# Altium PCB io_expansion_v9.PcbDoc
Units mil, origin at the board's own origin, x right, y up, seen from the top; angles counter-clockwise.
Board outline 1100 x 1020 mil, 4 copper layers (Top Layer, GND, VCC, Bottom Layer), stack 30.634 mil thick; 18 components, 30 nets, 131 pads, 64 vias.
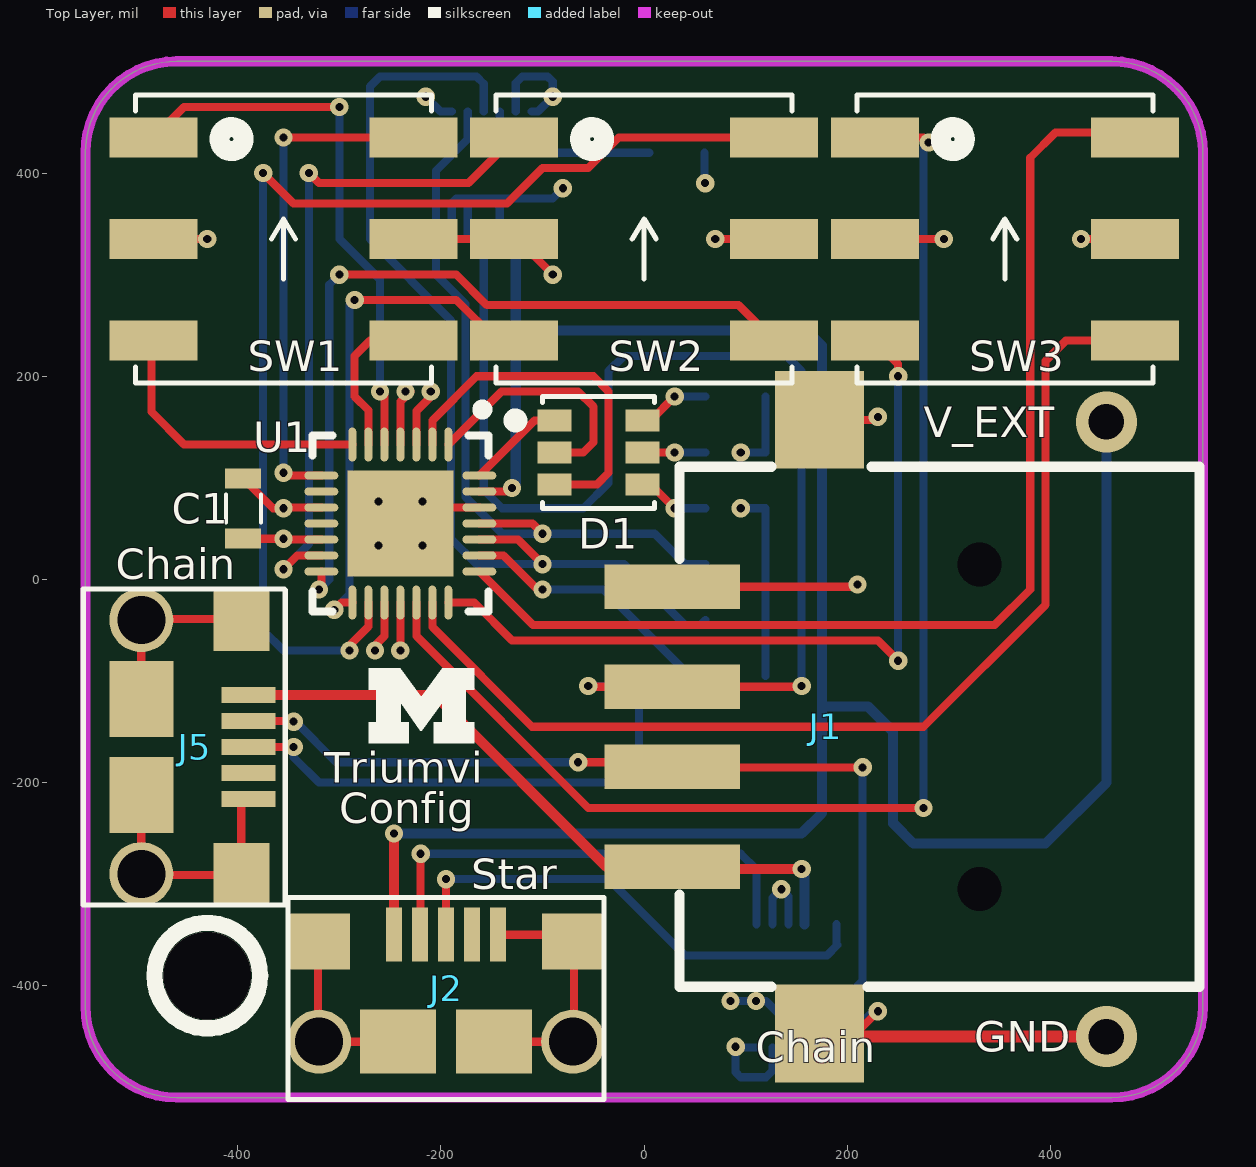
[diagram p0: Top Layer view]
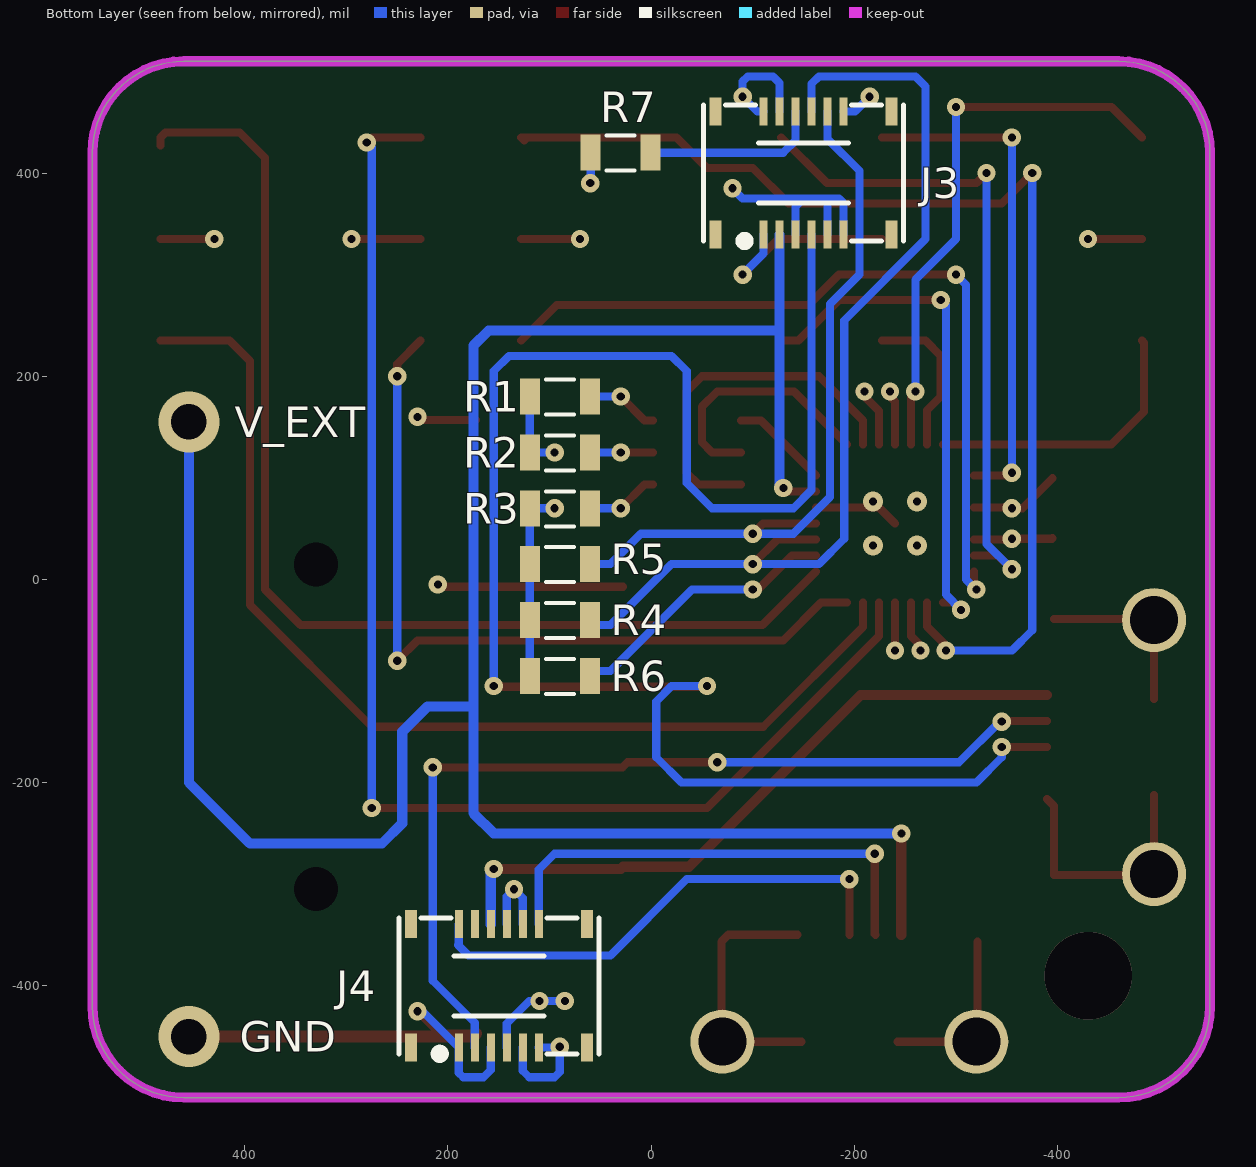
[diagram p1: Bottom Layer view, seen from below]
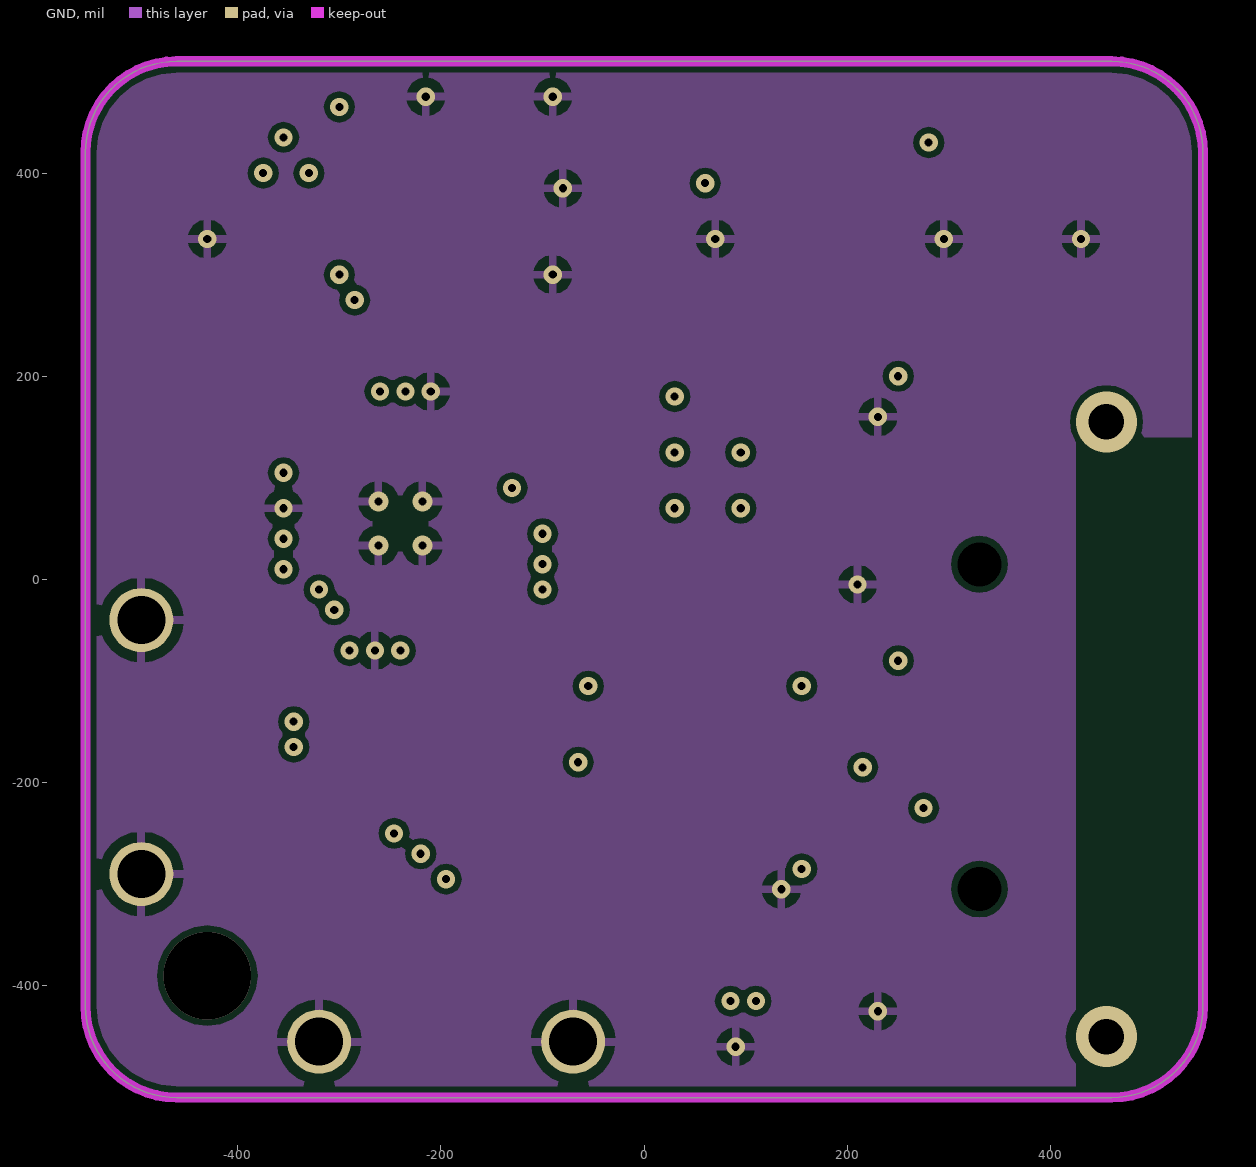
[diagram p2: GND]
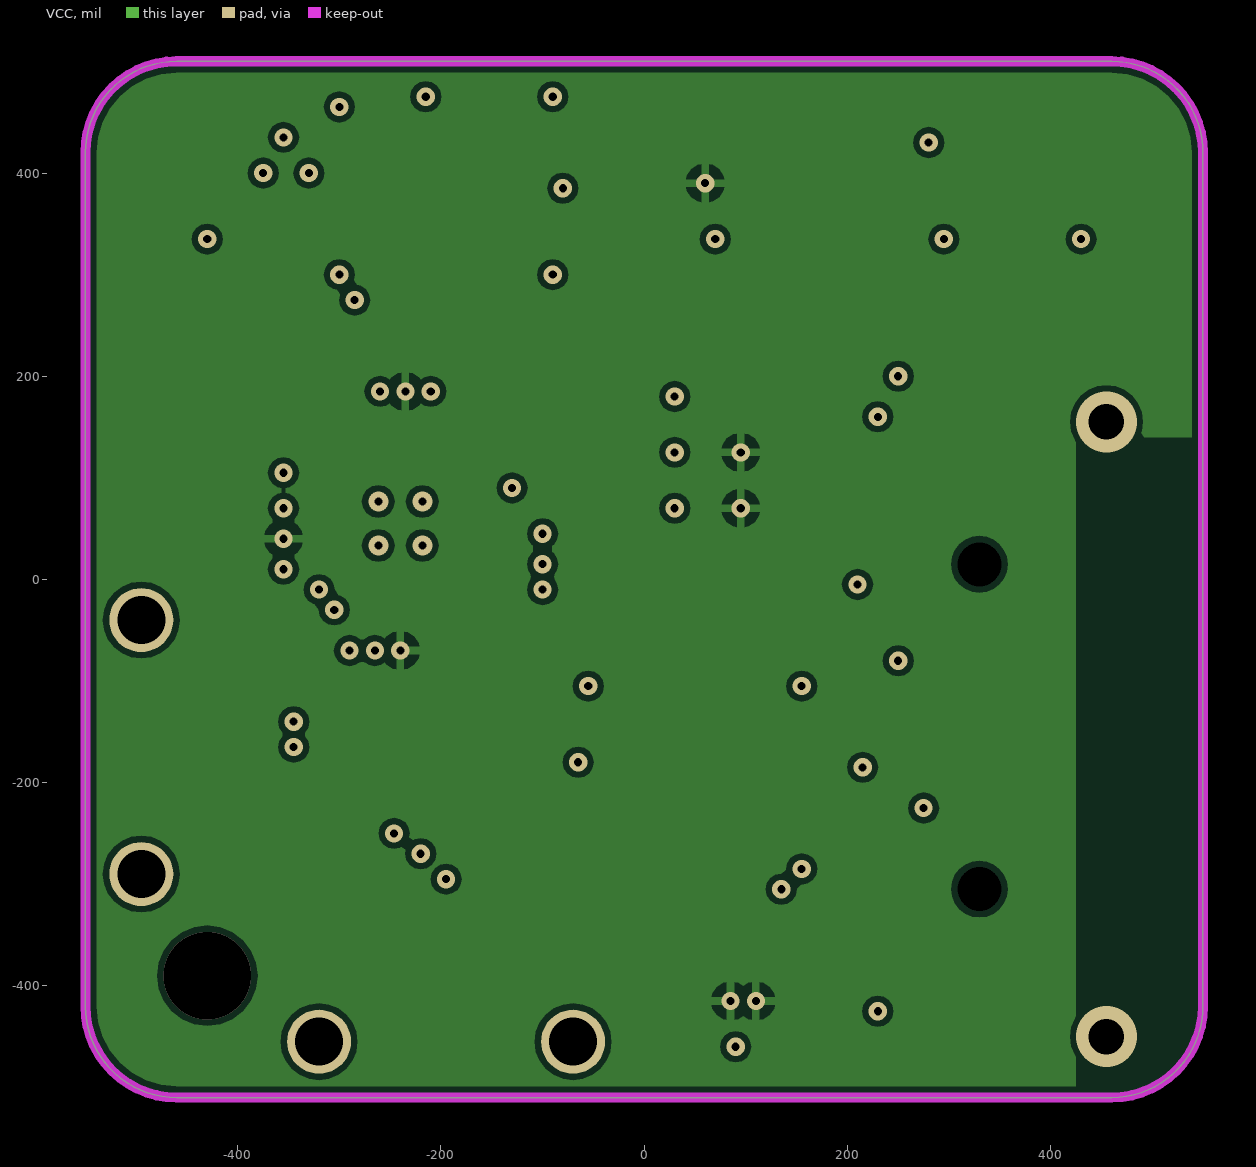
[diagram p3: VCC]
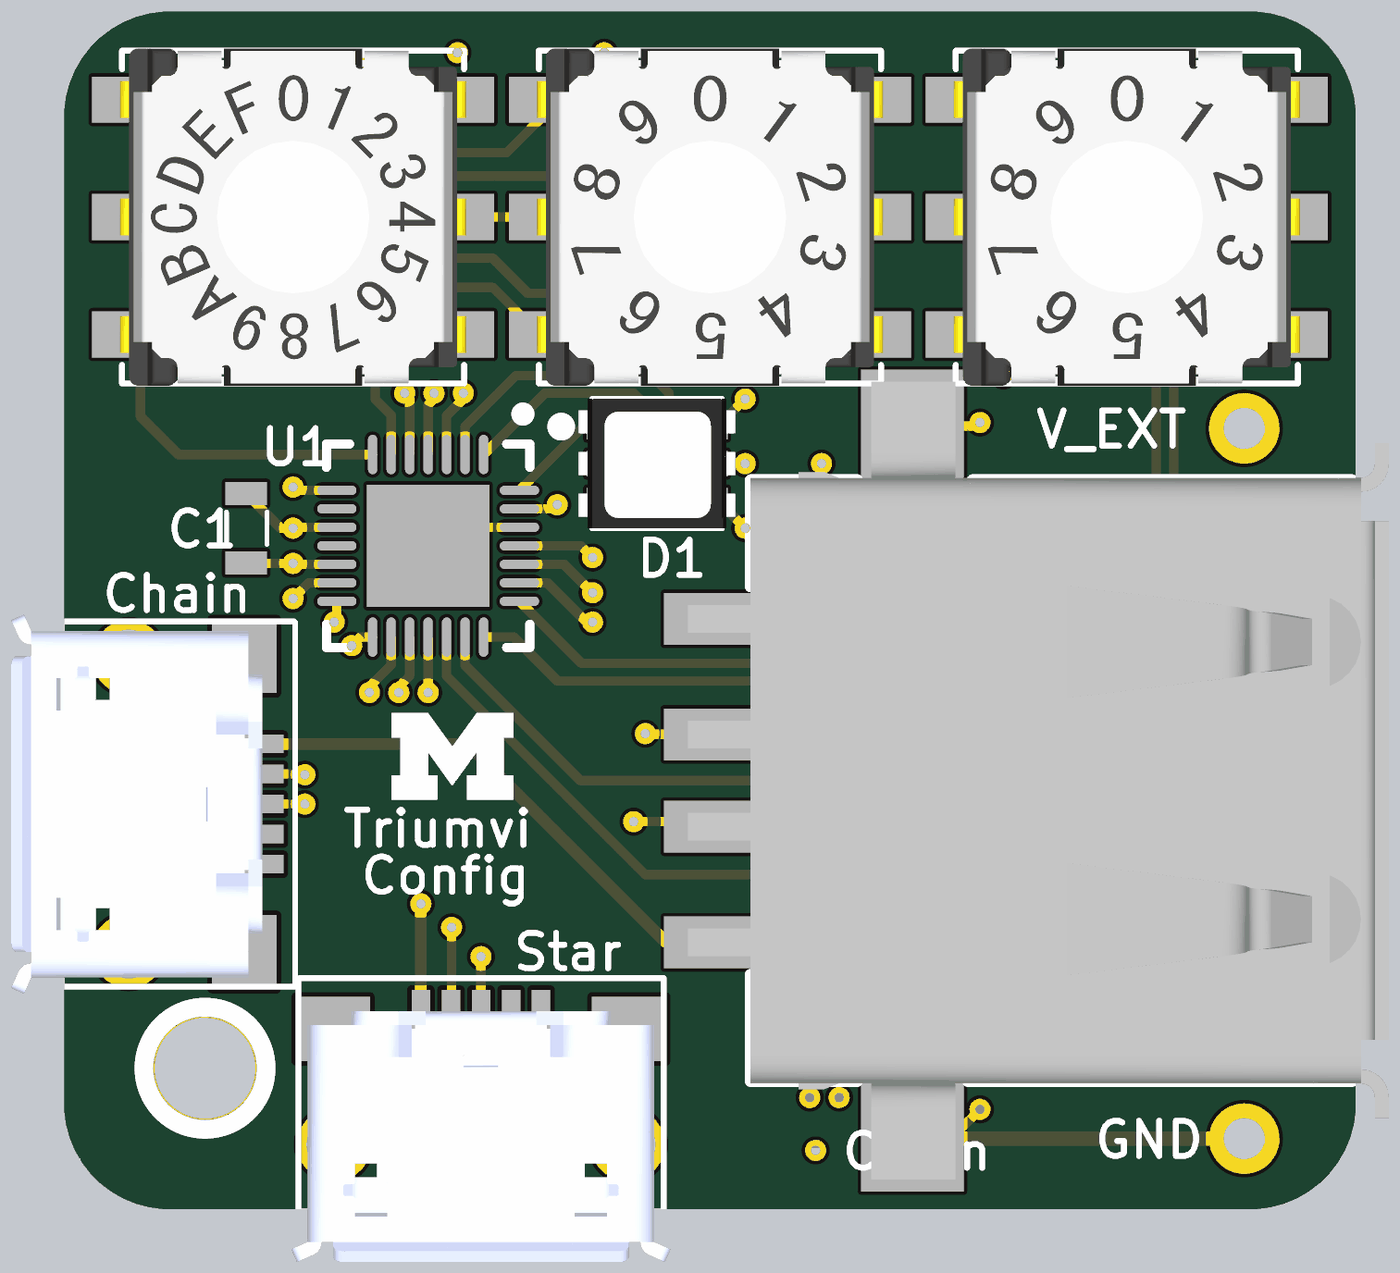
[diagram p4: 3D render of the assembled board from above, using the file's embedded part models]

## Layer stack, top to bottom
Top Solder: solder mask 0.4, Solder Resist, Dk 3.5
Top Layer: signal copper 1.4
Dielectric 1: core 10, FR-4, Dk 4.2
GND: signal copper 1.417
Dielectric 3: prepreg 5, Dk 4.2
VCC: signal copper 1.417
VCC: core 10, Dk 4.2
Bottom Layer: signal copper 1.4
Bottom Solder: solder mask 0.4, Solder Resist, Dk 3.5

## Board outline
-550,-420 -550,420 cw(c-460,420) -460,510 460,510 cw(c460,420) 550,420 550,-420 cw(c460,-420) 460,-510 -460,-510 cw(c-460,-420)

## Design rules (kind name [scope] priority, off if disabled: settings)
Clearance "non plated holes" [InPadClass('NPHOLES')] p1: gap=10 // Sunstone Circuits Minimum Clearance Rule (MLB~4&6 Layer Designs)
Clearance "Clearance~Sunstone Circuits" [All] p2: gap=6 // Sunstone Circuits Minimum Clearance Rule (MLB~4&6 Layer Designs)
DiffPairsRouting [All] p1: maxlimit=10 minlimit=10 mostfreqgap=10 toplayer_minwidth=6 toplayer_maxwidth=15 toplayer_prefwidth=15 midlayer1_minwidth=6 midlayer1_maxwidth=15 midlayer1_prefwidth=15 midlayer2_minwidth=6 midlayer2_maxwidth=15 midlayer2_prefwidth=15 bottomlayer_minwidth=6 bottomlayer_maxwidth=15 bottomlayer_prefwidth=15 maxuncoupledlength=500
HoleSize "HoleSize~Sunstone Circuits" [All] p1: absolutevalues=TRUE maxlimit=251 minlimit=8 maxpercent=80.000 minpercent=20.000 // Sunstone Circuits Hole Size Rule (MLB~4&6 Layer Designs)
HoleSize Testpoint [All] p2: absolutevalues=TRUE maxlimit=100 minlimit=1 maxpercent=80.000 minpercent=20.000
HoleSize TestPointUsage [All] p3: absolutevalues=TRUE maxlimit=100 minlimit=1 maxpercent=80.000 minpercent=20.000
MinimumAnnularRing "MinimumAnnularRing~Sunstone Circuits" [All] p1 off: minimumring=7 // Sunstone Circuits Minimum Annular Ring (MLB~4&6 Layer Designs)
MinimumSolderMaskSliver [All] p1 off: minsoldermaskwidth=10
PlaneClearance "PlaneClearance~Sunstone Circuits" [All] p1: clearance=12 // Sunstone Circuits Power Plane Clearance Rule (MLB~4&6 Layer Designs)
PlaneConnect "PlaneConnect~Sunstone Circuits" [All] p1: planeconnectstyle=Relief reliefexpansion=10 reliefentries=4 reliefconductorwidth=8 reliefairgap=10 // Sunstone Circuits Power Plane Connect Rule (MLB~4&6 Layer Designs)
PolygonConnect "PolygonConnect~Sunstone Circuits" [All] p1: connectstyle=Relief reliefconductorwidth=8 reliefentries=4 polygonreliefangle="90 Angle" airgapwidth=10 // Sunstone Circuits Polygon Connect Style (MLB~4&6 Layer Designs)
RoomDefinition io_expansion [InComponentClass('io_expansion')] p1 off: confinementstyle=ConfineIn formatcopy=TRUE lockcomponents=FALSE outline -539.26,175.77 -539.26,484.23 -260.93,484.23 -260.93,487.41 -39.07,487.41 -39.07,484.23 539.26,484.23 539.26,20.52 544.22,20.52 544.22,-524.67 45.78,-524.67 45.78,-516.59 -450.91,-516.59 -450.91,23.74 -494.61,23.74 -494.61,175.77
RoutingVias "RoutingVias~Sunstone Circuits" [All] p1: holewidth=16 width=30 viastyle="Through Hole" minholewidth=6 minwidth=18 maxholewidth=20 maxwidth=40 // Sunstone Circuits Routing Vias Rule (MLB~4&6 Layer Designs)
ShortCircuit "ShortCircuit~Sunstone Circuits" [All] p1: allowed=FALSE // Sunstone Circuits Short Circuit Rule~Do Not Allow (MLB~4&6 Layer Designs)
SilkToSilkClearance [All] p1 off: silktosilkclearance=10
SilkToSolderMaskClearance [IsPad] p1 off: minsilkscreentomaskgap=10 clearancetoexposedcopper=TRUE
SolderMaskExpansion TentVias [isVia] p1: expansion=-20 // Sunstone Circuits Solder Mask Expansion Rule (MLB~4&6 Layer Designs)
SolderMaskExpansion "SolderMaskExpansion~Sunstone Circuits" [All] p2: expansion=3 // Sunstone Circuits Solder Mask Expansion Rule (MLB~4&6 Layer Designs)
ViasUnderSMD "ViasUnderSMD~Sunstone Circuits" [All] p1: allowed=FALSE // Sunstone Circuits Vias Under SMD~Do Not Allow (MLB~4&6 Layer Designs)
Width "Width~Sunstone Circuits" [All] p1: maxlimit=100 minlimit=6 preferedwidth=10 // Sunstone Circuits Minimum Width Rule (MLB~4&6 Layer Designs)
22 further rules are at their usual default settings.

## Components (designator, comment, footprint, x,y, rotation, side; value= is the part's Value field where it differs from the comment)
C1 "Ceramic capacitor" 0603 -395,70 r90 top
D1 "CLY6D-FKC" PLCC6 -45,125 r0 top
J1 "292303-9" 292303-9 330,-145 r90 top
J2 "micro USB-B" "Micro USB-B" -195,-455 r0 top
J3 "DF40B(2.0)-12DS-0.4V" DF40B(2.0)-12DS-0.4V -150,400 r180 bottom locked
J4 "DF40B(2.0)-12DS-0.4V" DF40B(2.0)-12DS-0.4V 150,-400 r180 bottom locked
J5 "micro USB-B" "Micro USB-B" -495,-165 r270 top
R1 "Chip resistor" 0603 90,180 r180 bottom
R2 "Chip resistor" 0603 90,125 r180 bottom
R3 "Chip resistor" 0603 90,70 r180 bottom
R4 "Chip resistor" 0603 90,-40 r180 bottom
R5 "Chip resistor" 0603 90,15 r180 bottom
R6 "Chip resistor" 0603 90,-95 r180 bottom
R7 "Chip resistor" 0603 30,420 r180 bottom
SW1 "SH-7050TA" SH-7050A -355,335 r0 top
SW2 "SH-7010TA" SH-7010A 0,335 r0 top
SW3 "SH-7010TA" SH-7010A 355,335 r0 top
U1 "SX1509B" QFN40P400X400X60_HS-29N -240,55 r270 top

## Footprints (in the part's own frame and the unit in brackets; to place one, negate y for a bottom-side part, rotate by r counter-clockwise, add the part's x,y. Pads: shape width x height; smd on the part's side, far side on the other; paste and mask are expansions set on the pad)
0603 [mm] "2-Leads, Body 1.55x0.85mm, IPC Medium Density"
  rect 0.5x0.9 smd: 1(-0.75,0) 2(0.75,0)
  silkscreen extent -0.35,-0.45 0.35,0.43, body extent -0.75,-0.42 0.75,0.43, height 0.5
292303-9 [mm] "USB A, SMT"
  rect 1.12x3.39 smd: 1(-3.5,7.68) 2(-1,7.68) 3(1,7.68) 4(3.5,7.68)
  rect 2.44x2.22 smd: 5(-7.67,4) 5(7.67,4)
  rect 0x0 hole 1.1 unplated: ""(-4.06,0) ""(4.06,0)
  silkscreen extent -6.5,-5.5 6.5,7.5, body extent -8.63,-6.3 8.63,8.86, height 7.81
DF40B(2.0)-12DS-0.4V [mm] "Hirose DF40 Series, 0.4 mm pitch, 2.0 mm stack height, 12 positions"
  rect 0.2x0.7 smd: 1(-1,-1.54) 2(-0.6,-1.54) 3(-0.2,-1.54) 4(0.2,-1.54) 5(0.6,-1.54) 6(1,-1.54) 7(1,1.54) 8(0.6,1.54) 9(0.2,1.54) 10(-0.2,1.54) 11(-0.6,1.54) 12(-1,1.54)
  rect 0.3x0.7 smd: ""(-2.2,-1.54) ""(-2.2,1.54) ""(2.2,-1.54) ""(2.2,1.54)
  silkscreen extent -2.5,-1.8 2.5,1.7, body extent -2.5,-1.69 2.5,1.69, height 1.9
"Micro USB-B" [mm]
  rect 0.4x1.35 smd mask+0.1: 1(-1.3,2.675) 2(-0.65,2.675) 3(0,2.675) 4(0.65,2.675) 5(1.3,2.675)
  rect 1.6x1.4 smd mask+0.1: 6(-3.2,2.5) 6(3.2,2.5)
  round 1.6 hole 1.2: 6(-3.175,0) 6(3.175,0)
  rect 1.9x1.6 smd mask+0.1: 6(-1.2,0) 6(1.2,0)
  silkscreen extent -3.95,-1.45 3.95,3.6, body extent -4.1,-2.54 4.1,2.89, height 2.68
PLCC6 [mm] "CREE PLCC6 LED"
  rect 0.85x0.55 smd: 1(-1.1,0.8) 2(-1.1,0) 3(-1.1,-0.8) 4(1.1,-0.8) 5(1.1,0) 6(1.1,0.8)
  silkscreen extent -2.22,-1.4 1.4,1.4, body extent -1.7,-1.4 1.7,1.4, height 1.85
QFN40P400X400X60_HS-29N [mm] "QFN, 28-Leads, Body 4.00x4.00mm, Pitch 0.40mm, Thermal Pad 2.65x2.65mm, IPC Medium Density"
  oval 0.85x0.2 smd: 1(-1.975,1.2) 2(-1.975,0.8) 3(-1.975,0.4) 4(-1.975,0) 5(-1.975,-0.4) 6(-1.975,-0.8) 7(-1.975,-1.2) 15(1.975,-1.2) 16(1.975,-0.8) 17(1.975,-0.4) 18(1.975,0) 19(1.975,0.4) 20(1.975,0.8) 21(1.975,1.2)
  oval 0.2x0.85 smd: 8(-1.2,-1.975) 9(-0.8,-1.975) 10(-0.4,-1.975) 11(0,-1.975) 12(0.4,-1.975) 13(0.8,-1.975) 14(1.2,-1.975) 22(1.2,1.975) 23(0.8,1.975) 24(0.4,1.975) 25(0,1.975) 26(-0.4,1.975) 27(-0.8,1.975) 28(-1.2,1.975)
  rect 2.65x2.65 smd: 29(0,0)
  silkscreen extent -2.97,-2.2 2.2,2.2, body extent -2.05,-2.05 2.05,2.05, height 0.6
SH-7010A [mm] "Rotary Coded Switch, SH-7000 series, 10 positions, real code, J hook"
  rect 2.2x1 smd: 1(-3.25,2.54) 2(3.25,-2.54) 4(-3.25,-2.54) 8(3.25,2.54) C(-3.25,0) C(3.25,0)
  silkscreen extent -3.7,-3.6 3.7,3.6, body extent -3.75,-3.65 3.75,3.65, height 3.77
SH-7050A [mm] "Rotary Coded Switch, SH-7000 series, 16 positions, real code, J hook"
  rect 2.2x1 smd: 1(-3.25,2.54) 2(3.25,-2.54) 4(-3.25,-2.54) 8(3.25,2.54) C(-3.25,0) C(3.25,0)
  silkscreen extent -3.7,-3.6 3.7,3.6, body extent -3.75,-3.65 3.75,3.65, height 3.77

## Part data
C1: library part C_0.1u_25V_0603_ceramic, "Ceramic capacitor, 0.1 uF, 0603 package"
D1: library part D_CLY6D-FKC, "CREE PLCC6 3 in 1 SMD LED"
J1: "USB 2.0 Type A"
J2 J5: library part "Micro USB", "CONN USB MICRO B RECPT SMT R/A"
J3 J4: "Hirose BM20 Series, 0.4mm pitch, 2mm stack height, 12 pos, header"
R1: library part R_150_0603, "Chip resistor, 150,  0603 package"
R2: library part R_220_0603, "Chip resistor, 220, 0603 package"
R3: library part R_330_0603, "Chip resistor, 330, 0603 package"
R4 R5: library part R_20K_0603, "Chip resistor, 20K, 0603 package"
R6 R7: library part R_100K_0603, "Chip resistor, 100K, 0603 package"
SW1 SW2 SW3: "ROTARY CODED SWITCHES"
U1: "Voltage Level Shifting GPIO  with LED Driver and Keypad Engine"

## Via types
v1: diameter 18, hole 8, Top Layer to Bottom Layer, 57 vias
v2: diameter 19.68, hole 8, Top Layer to Bottom Layer, 4 vias
v3: diameter 60, hole 35, Top Layer to Bottom Layer, 2 vias
v4: diameter 86, hole 86, Top Layer to Bottom Layer, 1 vias

## Nets (pads, with @x,y where several pads share a name; then routed paths per layer and width w, separated by ;. In a path a pad name is that pad's centre, name@x,y a point inside that pad or via, vN(x,y) a via of type N, cw(c..) or ccw(c..) an arc to the next point about the centre after c; other vN are vias at no path point)
BATT_PACK_PWR: C1.1 J4.4 R1.1 R2.1 R3.1 R4.1 R5.1 R6.1 R7.1 U1.4 U1.12 U1.18 | length 575.4
  Top Layer w8: C1.1 -394.53,40 v1(-355,40) -354.25,39.25 U1.12 ; v1(-240,-70) U1.18 ; U1.4 -240,175 -230,185 v1(-235,185)
  Bottom Layer w8: R7.1 59.53,390.47 v1(60,390) ; v1(85,-415) v1(110,-415) 120,-415 142.13,-437.13 J4.4 ; v1(95,70) R3.1 R5.1 R4.1 R6.1 ; v1(95,125) R2.1 R1.1
EXT_VOLT_SEL: J2.3 J4.12 | length 495.8
  Top Layer w8: J2.3 v1(-195,-295)
  Bottom Layer w8: v1(-195,-295) -35,-295 40,-370 180,-370 190,-360 189.37,-359.37 J4.12
EXT_VOLT_WAVE: J2.2 J4.7 | length 470.8
  Top Layer w8: J2.2 -220,-349.09 v1(-220,-270)
  Bottom Layer w8: v1(-220,-270) 95,-270 110.63,-285.63 J4.7
GND: C1.2 J1.4 J1.5 J2.5 J2.6 J3.1 J3.3 J3.5 J3.6 J3.7 J3.11 J3.12 J4.1 J4.3 J4.5 J4.6 J4.8 J4.9 J5.5 J5.6 SW1.C SW2.C SW3.C U1.3 U1.10 U1.17 U1.26 U1.29 | length 2863.3
  Top Layer w8: J5.6@-495,-212.24 -495,-290 -494.02,-290.98 -396.57,-290.98 -396.57,-223.07 J5.5 ; J5.6@-495,-117.76 -495,-40 -494.02,-39.02 J5.6@-396.57,-39.02 ; SW1.C@-482.95,335 v1(-430,335) ; C1.2 -365.47,70 v1(-355,70) -354.25,70.75 U1.10 ; J2.6@-320.98,-356.57 -320.98,-454.02 -320,-455 J2.6@-242.24,-455 ; v1(-265,-70) -265,-65 -255.75,-55.75 U1.17 ; U1.29 -224.25,70.75 U1.26 ; SW1.C@-227.05,335 -127.95,335 -125,335 v1(-90,300) ; U1.3 -224.25,165.75 -205,185 v1(-210,185) ; J2.6@-147.76,-455 -70,-455 -69.02,-454.02 -69.02,-356.57 -75.91,-349.68 J2.5 ; J1.4 207.8,-7.2 v1(210,-5) ; v1(70,335) SW2.C@127.95,335 ; J1.5@172.52,-446.97 208.03,-446.97 v1(230,-425) ; J1.5@172.52,156.97 226.97,156.97 v1(230,160) ; SW3.C@227.05,335 v1(295,335) ; v1(430,335) SW3.C@482.95,335
  Top Layer w12: J1.5@172.52,-446.97 175.55,-450 v3(455,-450)
  Bottom Layer w8: v1(-215,475) -200.63,460.63 J3.7 ; J3.6 -189.37,370.63 -185,375 -170,375 ; J3.5 -173.62,371.38 -170,375 ; J3.3 -142.13,367.13 -150,375 ; J3.11 -126.38,488.62 -120,495 -95,495 -90,490 v1(-90,475) -104.37,460.63 J3.12 ; J3.1 -110.63,320.63 v1(-90,300) ; v1(-80,385) -90,375 -150,375 ; J4.6 90.63,-460.63 90,-461.26 90,-485 95,-490 120,-490 126.38,-483.62 J4.5 ; J4.8 126.38,-313.62 v1(135,-305) 142.13,-312.13 J4.9 ; J4.3 157.87,-482.87 165,-490 185,-490 189.37,-485.63 J4.1 225,-425 v1(230,-425) ; -170,375 -150,375
  other v1: 90,-460
  other v2: -261.65,33.35 -218.35,33.35 -261.65,76.65 -218.35,76.65
I2C_SCL: J3.8 R5.2 U1.25 | length 734.8
  Top Layer w8: U1.25 -110,55 v1(-100,45)
  Bottom Layer w8: J3.8 -173.62,433.62 -205,402.24 -205,300 -176,271 -176,81 -140,45 v1(-100,45) 10,45 40,15 R5.2
I2C_SDA: J3.9 R4.2 U1.24 | length 984.6
  Top Layer w8: U1.24 -124.25,39.25 v1(-100,15)
  Bottom Layer w8: J3.9 -157.87,487.87 -165,495 -260,495 -270,485 -270,335 -190,255 -190,40 -165,15 v1(-100,15) -20,15 40,-45 55.47,-45 R4.2
NetD1_1: D1.1 U1.28 | length 96.4
  Top Layer w8: U1.28 -107.99,156.5 D1.1
NetD1_2: D1.2 U1.1 | length 248.1
  Top Layer w8: U1.1 -140.51,185 -65,185 -50,170 -50,135 -60,125 D1.2
NetD1_3: D1.3 U1.2 | length 359.5
  Top Layer w8: U1.2 -208.5,156.5 -165,200 -50,200 -35,185 -35,105 -46.5,93.5 D1.3
NetD1_4: D1.4 R3.2 | length 71.9
  Top Layer w8: D1.4 6.5,93.5 v1(30,70)
  Bottom Layer w8: v1(30,70) R3.2
NetD1_5: D1.5 R2.2 | length 62.2
  Top Layer w8: D1.5 v1(30,125)
  Bottom Layer w8: v1(30,125) R2.2
NetD1_6: D1.6 R1.2 | length 71.9
  Top Layer w8: D1.6 6.5,156.5 v1(30,180)
  Bottom Layer w8: v1(30,180) R1.2
NetJ3_10: J3.10 R7.2 | length 180.7
  Bottom Layer w8: J3.10 -142.13,432.13 -130,420 R7.2@5,420
NetR6_2: R6.2 U1.23 | length 271.8
  Top Layer w8: U1.23 -138.5,23.5 -105,-10 v1(-100,-10)
  Bottom Layer w8: v1(-100,-10) -40,-10 40,-90 55.47,-90 R6.2
NetSW1_1: SW1.1 U1.5 | length 546
  Top Layer w8: SW1.1 -452.95,465 v1(-300,465) ; v1(-260,185) -255.75,180.75 U1.5
  Bottom Layer w8: v1(-300,465) -300,335 -260,295 v1(-260,185)
NetSW1_2: SW1.2 U1.6 | length 157
  Top Layer w8: U1.6 -271.5,166.5 -285,180 -285,220 -270,235 SW1.2
NetSW1_4: SW1.4 U1.7 | length 282
  Top Layer w8: SW1.4 -485,232.95 -485,165 -452.76,132.76 U1.7
NetSW1_8: SW1.8 U1.8 | length 496.3
  Top Layer w8: v1(-355,105) -352.24,102.24 U1.8 ; v1(-355,435) SW1.8
  Bottom Layer w8: v1(-355,105) v1(-355,435)
NetSW2_1: SW2.1 U1.13 | length 668
  Top Layer w8: v1(-355,10) -341.5,23.5 U1.13 ; v1(-330,400) -320,390 -172.95,390 SW2.1
  Bottom Layer w8: v1(-355,10) -330,35 v1(-330,400)
NetSW2_2: SW2.2 U1.14 | length 791.8
  Top Layer w8: v1(-320,-10) -317.76,-7.76 U1.14 ; v1(-300,300) -185,300 -155,270 92.95,270 SW2.2
  Bottom Layer w8: v1(-320,-10) -310,0 -310,290 v1(-300,300)
NetSW2_4: SW2.4 U1.15 | length 507.7
  Top Layer w8: v1(-305,-30) -297.76,-22.76 U1.15 ; v1(-285,275) -185,275 -145,235 SW2.4
  Bottom Layer w8: v1(-305,-30) -290,-15 -290,270 v1(-285,275)
NetSW2_8: SW2.8 U1.16 | length 1149.7
  Top Layer w8: v1(-375,400) -345,370 -135,370 -100,405 -55,405 -25,435 SW2.8 SW2.8@125,432.05 ; v1@-285,-70 v1(-290,-70) -290,-65 -271.5,-46.5 U1.16
  Bottom Layer w8: v1(-375,400) -375,-50 -355,-70 v1(-290,-70)
NetSW3_1: SW3.1 U1.19 | length 1314.4
  Top Layer w8: U1.19 -224.25,-55.75 -55,-225 v1(275,-225) ; SW3.1 275,435 v1(280,430)
  Bottom Layer w8: v1(275,-225) 275,425 v1(280,430)
NetSW3_2: SW3.2 U1.20 | length 1054.2
  Top Layer w8: U1.20 -208.5,-46.78 -110.28,-145 275,-145 395,-25 395,215 415,235 SW3.2
NetSW3_4: SW3.4 U1.21 | length 791
  Top Layer w8: U1.21 -167.24,-22.76 -130,-60 230,-60 v1(250,-80) ; SW3.4 250,212.05 v1(250,200)
  Bottom Layer w8: v1(250,-80) 250,-60 v1(250,200)
NetSW3_8: SW3.8 U1.22 | length 1126.9
  Top Layer w8: U1.22 -109.49,-45 345,-45 380,-10 380,415 405,440 477.95,440 SW3.8 SW3.8@482.95,427.05
R\D\Y\: J1.3 J3.4 J5.3 | length 1751.7
  Top Layer w8: J5.3 v1(-345,-165) ; v1(-55,-105) -54.37,-105.63 J1.3 154.37,-105.63 v1(155,-105)
  Bottom Layer w8: v1(-345,-165) -345,-175 -320,-200 -30,-200 -5,-175 -5,-120 -20,-105 v1(-55,-105) ; J3.4 -157.87,87.87 -140,70 -60,70 -35,95 -35,205 -20,220 140,220 155,205 v1(155,-105)
V_EXTERNAL: J2.1 J3.2 U1.27 | length 2349.8
  Top Layer w8: U1.27 -133.5,86.5 v1(-130.04,90)
  Top Layer w10: J2.1 v1(-246.18,-250)
  Bottom Layer w10: v1(-246.18,-250) 155,-250 175,-230 175,-125 ; v1(-130.04,90) -126.38,93.66 -126.38,245 ; J3.2 -126.38,245 ; v3(455,155) 455,-200 395,-260 265,-260 245,-240 245,-150 220,-125 175,-125 ; -126.38,245 160,245 175,230 175,-125
VCAP: J1.1 J4.10 J5.1 | length 671.2
  Top Layer w10: J5.1 -206.18,-113.82 -37.2,-282.8 J1.1 29.84,-285 v1(155,-285)
  Bottom Layer w10: v1(155,-285) 157.87,-287.87 J4.10
VCAP_LOOPBACK: J1.2 J4.2 J5.2 | length 916.3
  Top Layer w8: J5.2 -345.59,-139.41 v1(-345,-140) ; v1(-65,-180) 23.27,-180 J1.2 28.27,-185 v1(215,-185)
  Bottom Layer w8: v1(-345,-140) -343.13,-140 -303.13,-180 v1(-65,-180) ; J4.2 173.62,-436.38 215,-395 v1(215,-185)
pads on no net: J1. J2.4 J3. J4. J4.11 J5.4 U1.9 U1.11
copper on no net:
  other v4: -430,-390

## Polygon pours and split planes (outlines as drawn)
GND on GND "Top Layer-No Net" (solid, pour order 0): -550,-420 ccw(c-460,-420) -460,-510 460,-510 ccw(c460,-420) 550,-420 550,420 ccw(c460,420) 460,510 -460,510 ccw(c-460,420) -550,420
BATT_PACK_PWR on VCC "Top Layer-No Net" (solid, pour order 2): -550,-420 ccw(c-460,-420) -460,-510 460,-510 ccw(c460,-420) 550,-420 550,420 ccw(c460,420) 460,510 -460,510 ccw(c-460,420) -550,420

## Keep-outs
Keep-Out Layer:
  the board outline again, w10

## Other copper
GND:
  pour cut-out: 425,140 425,-520 559,-520 559,140
VCC:
  pour cut-out: 425,140 425,-520 559,-520 559,140

## Silkscreen, mask and mechanical layers (free items; w line width, h text height)
Top Overlay:
  circle w16: c-430,-390 r52
  region: -271.31,-161.48 -231.76,-161.48 -231.76,-140.36 -239.8,-140.36 -239.8,-121.26 -220.2,-148.74 -218.86,-148.74 -198.91,-121.26 -198.91,-140.36 -206.96,-140.36 -206.96,-161.48 -167.41,-161.48 -167.41,-140.36 -175.45,-140.36 -175.45,-108.52 -167.41,-108.52 -167.41,-87.41 -198.75,-87.41 -218.86,-115.23 -219.86,-115.23 -239.97,-87.41 -271.31,-87.41 -271.31,-108.52 -263.6,-108.52 -263.6,-140.36 -271.31,-140.36
  text "V_EXT" at 275,140 h30
  text "Chain" at -520,0 h30
  text "Triumvi" at -315,-200 h30
  text "Config" at -300,-240 h30
  text "Star" at -170,-305 h30
  text "GND" at 325,-465 h30
  text "Chain" at 110,-475 h30
Bottom Overlay:
  text "V_EXT" at 410,140 h30
  text "GND" at 405,-465 h30
Mechanical 14:
  lines w10: -560,-420 ccw(c-460,-420) -460,-520 ; -560,420 cw(c-460,420) -460,520 ; 460,-520 ccw(c460,-420) 560,-420 ; 460,520 cw(c460,420) 560,420
Mechanical 16:
  lines w10: -650,-520 650,-520 ; -650,520 650,520 ; -560,-610 -560,610 ; 560,-610 560,610